# Altium PCB PCB_Hammond_1591GSGY-v3B.PcbDoc
Units mil, origin at the board's own origin, x right, y up, seen from the top; angles counter-clockwise.
Board outline 4566.93 x 3503.94 mil, 2 copper layers (Top Layer, Bottom Layer); 57 components, 74 nets, 338 pads, 109 vias.
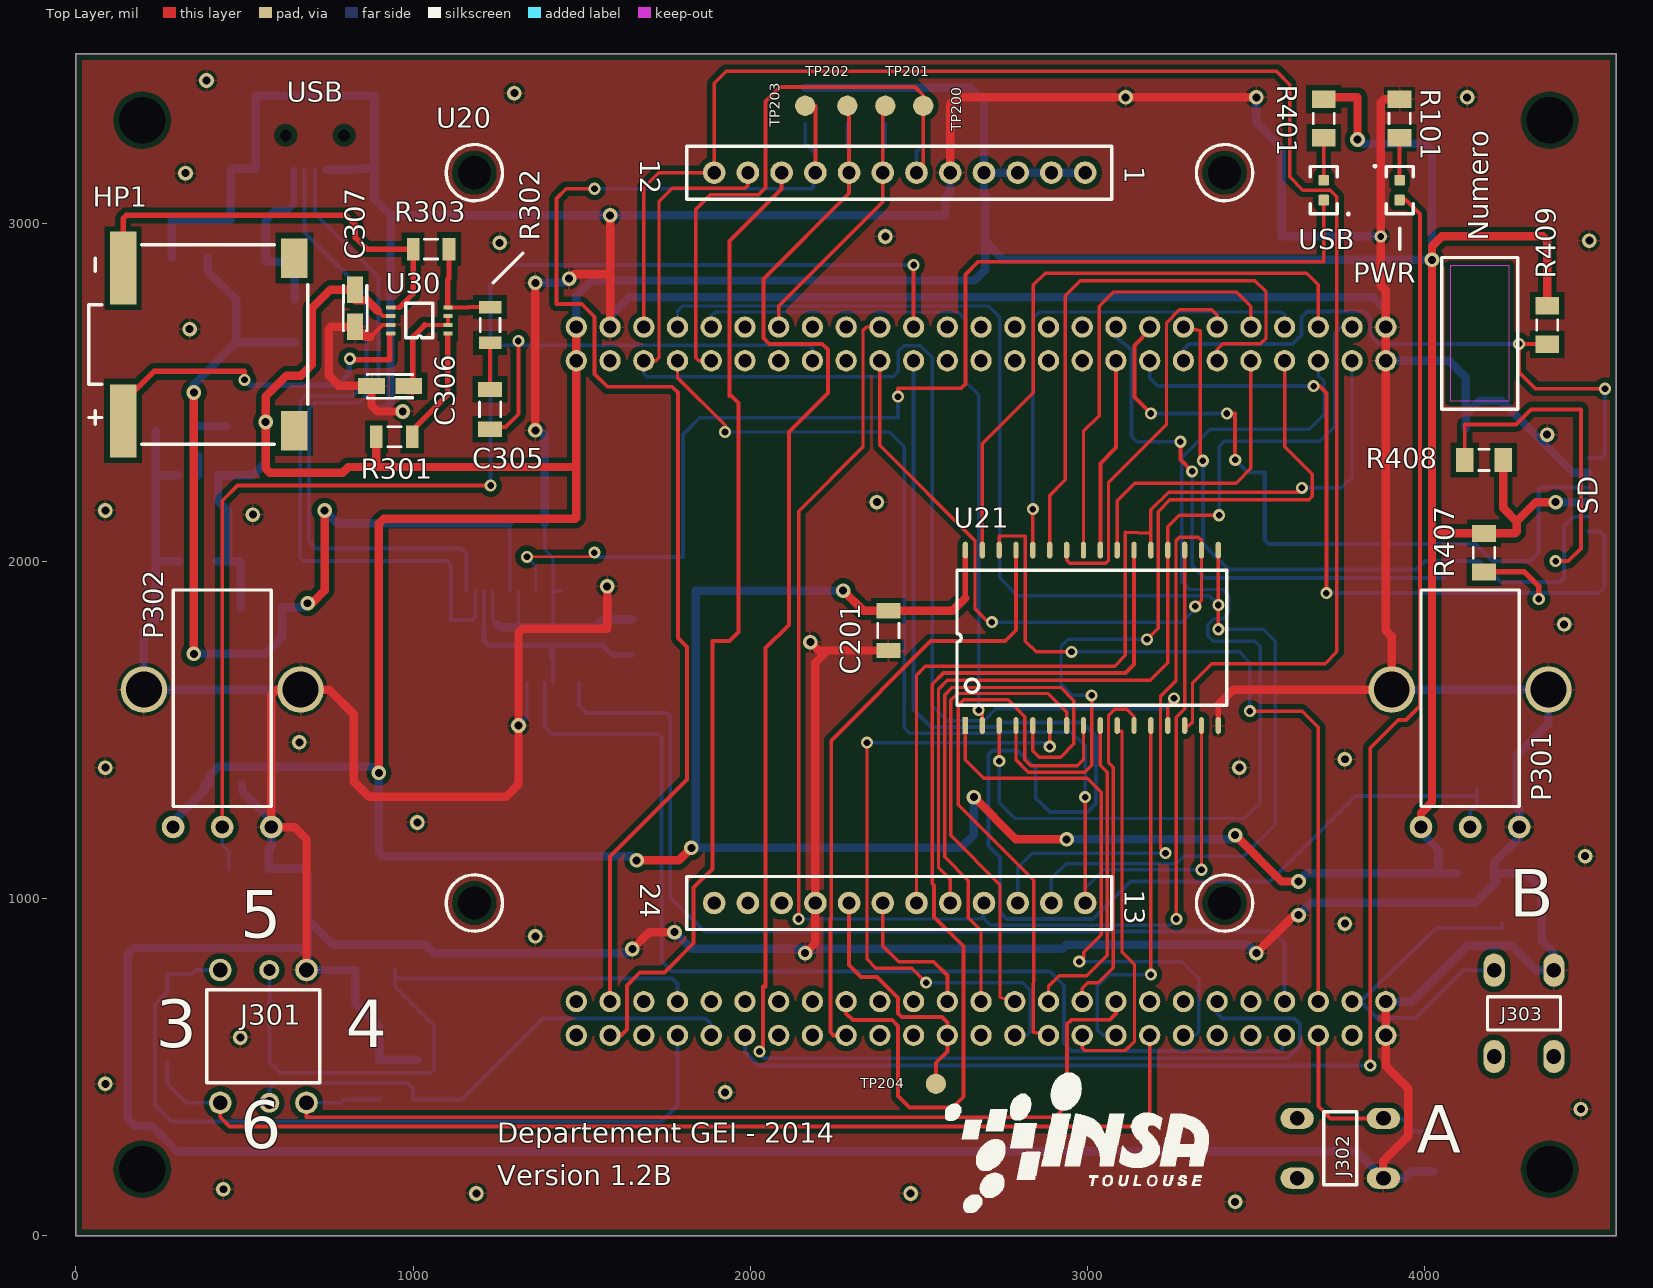
[diagram p0: Top Layer view]
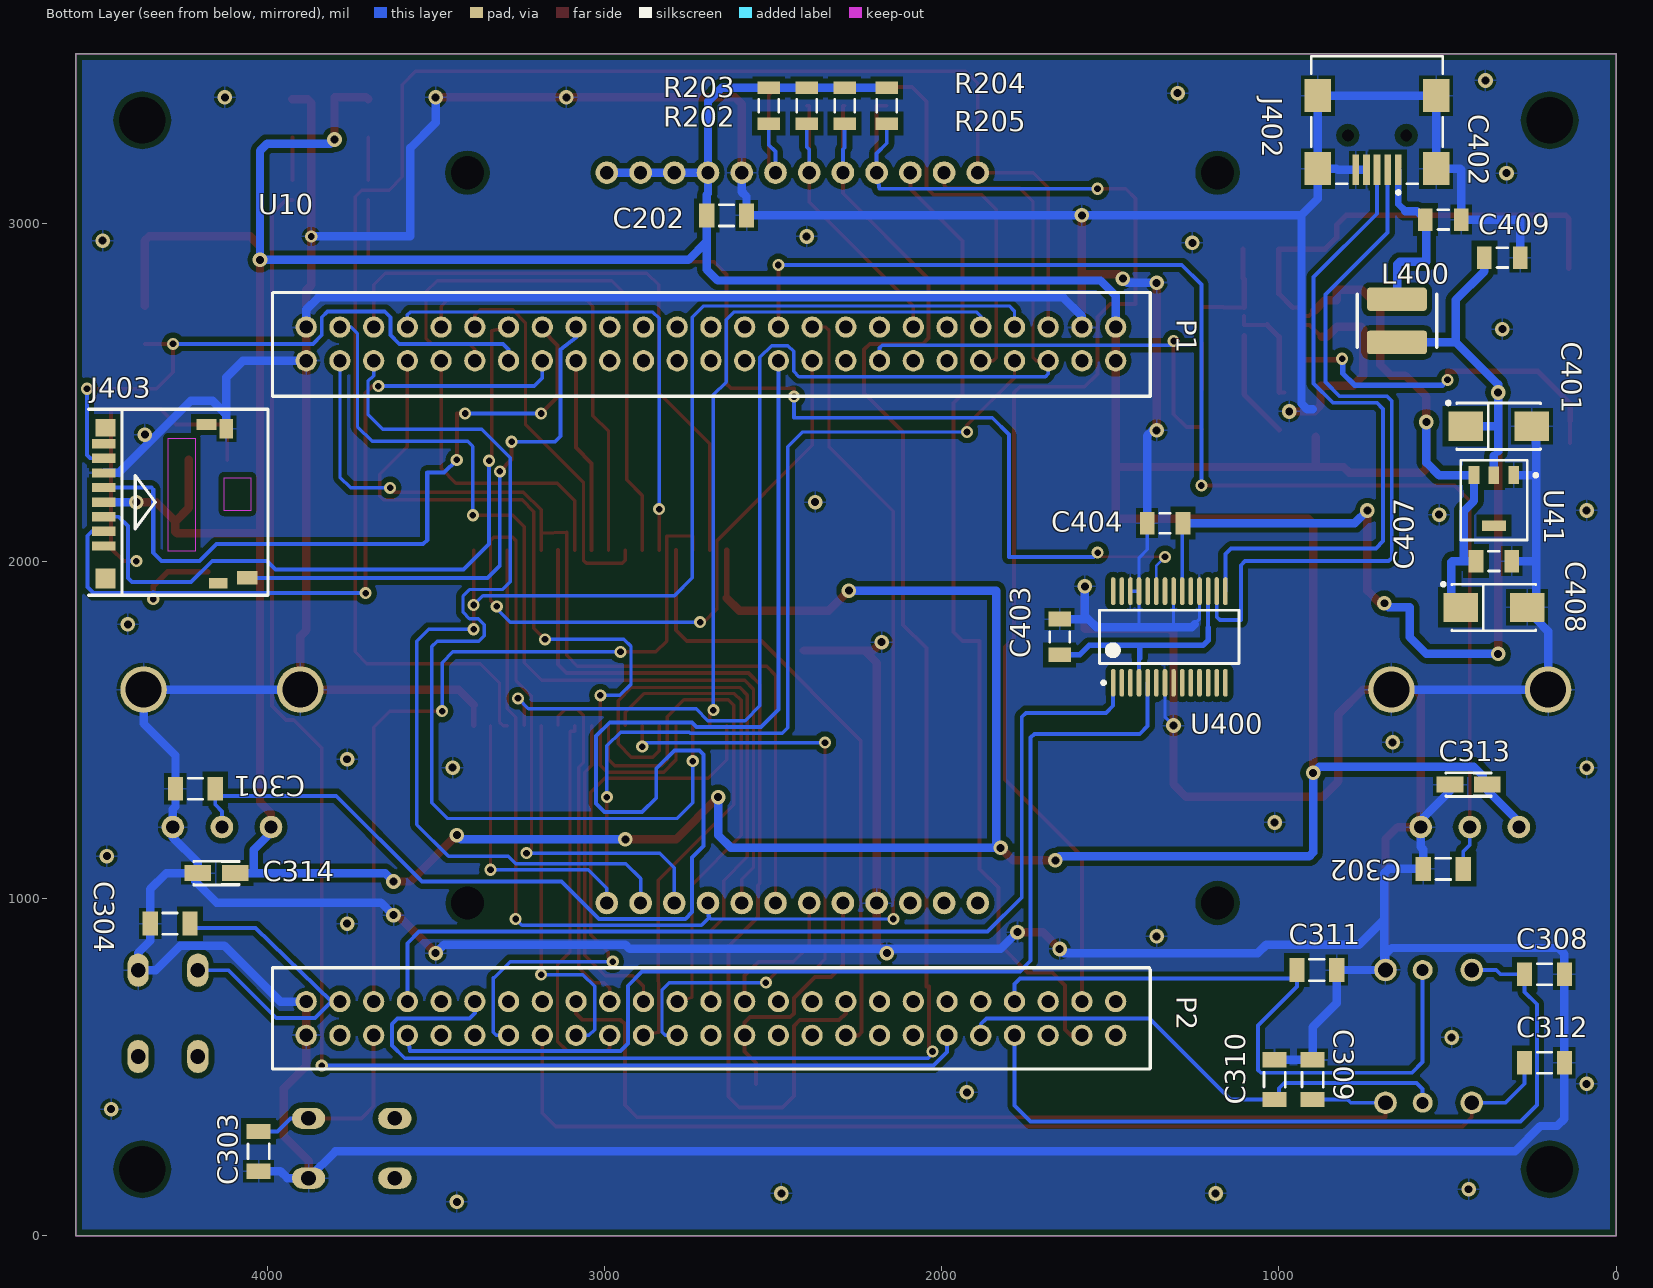
[diagram p1: Bottom Layer view, seen from below]

## Layer stack, top to bottom
Top Solder: solder mask 0.4, Solder Resist, Dk 3.5
Top Layer: signal copper 1.4
Dielectric1: dielectric 12.6, FR-4, Dk 4.8
Bottom Layer: signal copper 1.4
Bottom Solder: solder mask 0.4, Solder Resist, Dk 3.5

## Board outline
0,0 4566.93,0 4566.93,3503.94 0,3503.94

## Design rules (kind name [scope] priority, off if disabled: settings)
Clearance "Polygon Clearance" [InPolygon] p1: gap=16
Clearance [All] p2: gap=8
ComponentClearance [All] p1 off: gap=10 collisioncheckmode=3 verticalgap=10 showdistances=FALSE
DiffPairsRouting [All] p1: maxlimit=393.7 minlimit=4.92 mostfreqgap=5.91 toplayer_minwidth=15 toplayer_maxwidth=15 toplayer_prefwidth=15 bottomlayer_minwidth=15 bottomlayer_maxwidth=15 bottomlayer_prefwidth=15 maxuncoupledlength=500
FabricationTestPointUsage FabricationTestPointUsage_1 [All] p1: valid=0 allowmultiple=FALSE
FabricationTestpoint FabricationTestpoint_1 [All] p1: side=3 testpointundercomponent=TRUE minsize=40 maxsize=100 preferedsize=60 minholesize=0 maxholesize=40 preferedholesize=32 testpointgrid=1 allowsidetop=TRUE allowsidebottom=TRUE usegrid=TRUE gridtolerance=0.01
HoleSize [All] p1: absolutevalues=TRUE maxlimit=236.22 minlimit=11.81 maxpercent=80.000 minpercent=20.000
HoleSize FabricationTestpoint [All] p2 off: absolutevalues=TRUE maxlimit=100 minlimit=1 maxpercent=80.000 minpercent=20.000
HoleSize FabricationTestPointUsage [All] p3 off: absolutevalues=TRUE maxlimit=100 minlimit=1 maxpercent=80.000 minpercent=20.000
MinimumSolderMaskSliver [All] p1: minsoldermaskwidth=1.93
PlaneClearance [All] p1: clearance=19.68
PlaneConnect PlaneConnect_Power [InNetClass('Powwer')] p1: planeconnectstyle=Relief reliefexpansion=20 reliefentries=4 reliefconductorwidth=16 reliefairgap=16
PlaneConnect [All] p2: planeconnectstyle=Relief reliefexpansion=15.75 reliefentries=4 reliefconductorwidth=8 reliefairgap=10
PolygonConnect [All] p1: connectstyle=Relief reliefconductorwidth=5.91 reliefentries=4 polygonreliefangle="90 Angle" airgapwidth=10
RoutingCorners [All] p1: cornerstyle=45-Degree minsetback=16 maxsetback=16
RoutingVias RoutingVias_Power [InNetClass('Powwer')] p1: holewidth=23.62 width=43.31 viastyle="Through Hole" minholewidth=23.62 minwidth=43.31 maxholewidth=23.62 maxwidth=43.31
RoutingVias [All] p2: holewidth=19.68 width=35.83 viastyle="Through Hole" minholewidth=19.68 minwidth=35.83 maxholewidth=19.68 maxwidth=35.83
SMDNeckDown SMDNeckDown_others [InNetClass('Others')] p1: percent=100.000
SMDNeckDown SMDNeckDown_Power [InNetClass('Powwer')] p2: percent=100.000
SilkToSolderMaskClearance SilkscreenOverComponentPads [IsPad] p1: minsilkscreentomaskgap=10 clearancetoexposedcopper=TRUE
SolderMaskExpansion [All] p1: expansion=2.95
Width "Add bus" [InNetClass('A[0..18]')] p1: maxlimit=10 minlimit=8 preferedwidth=10
Width "Data Bus" [InNetClass('D[0..7]')] p2: maxlimit=10 minlimit=8 preferedwidth=10
Width "Power Bus" [InNetClass('Power')] p3: maxlimit=25 minlimit=9.8 preferedwidth=25
Width Default [All] p4: maxlimit=16 minlimit=8 preferedwidth=11.5
19 further rules are at their usual default settings.

## Classes and differential pairs
net class Power: 5V GND USB_VCC VCC
net class D[0..7]: D0 D1 D2 D3 D4 D5 D6 D7
net class A[0..18]: A0 A1 A2 A3 A4 A5 A6 A7 A8 A9 A10 A11 A12 A13 A14 A15 A16 A17 A18
component class Power_Debug: C401 C402 C403 C404 C407 C408 C409 J402 J403 L400 R401 R407 R408 R409 U41 U400 USB
component class MCU: PWR R101 U10
component class LCD_SRAM: C201 C202 R202 R203 R204 R205 TP200 TP201 TP202 TP203 TP204 U20 U21
component class Audio_Keys: C301 C302 C303 C304 C305 C306 C307 C308 C309 C310 C311 C312 C313 C314 HP1 J301 J302 J303 P301 P302 R301 R302 R303 U30

## Components (designator, comment, footprint, x,y, rotation, side; value= is the part's Value field where it differs from the comment)
C201 "CAP 100nF 16V 1206(3216)" CAPC1206(3216)100_N 2408.91,1793.91 r270 top
C202 "CAP 100nF 16V 1206(3216)" CAPC1206(3216)100_N 2637.5,3025 r180 bottom
C301 "CAP 100nF 16V 1206(3216)" CAPC1206(3216)100_N 4212.5,1325 r180 bottom
C302 "CAP 100nF 16V 1206(3216)" CAPC1206(3216)100_N 512.5,1087.5 r180 bottom
C303 "CAP 100nF 16V 1206(3216)" CAPC1206(3216)100_N 4025,250 r90 bottom
C304 "CAP 100nF 16V 1206(3216)" CAPC1206(3216)100_N 4287.5,925 r180 bottom
C305 "CAP 100nF 16V 1206(3216)" CAPC1206(3216)100_N 1228.15,2450 r270 top
C306 "Cap Pol3" "EAI 3216-18 A" 931.74,2518.59 r180 top
C307 "Cap Pol3" "EAI 3216-18 A" 828.15,2750 r270 top
C308 "CAP 100nF 16V 1206(3216)" CAPC1206(3216)100_N 212.5,775 r180 bottom
C309 "CAP 100nF 16V 1206(3216)" CAPC1206(3216)100_N 900,462.5 r90 bottom
C310 "CAP 100nF 16V 1206(3216)" CAPC1206(3216)100_N 1012.5,462.5 r90 bottom
C311 "CAP 100nF 16V 1206(3216)" CAPC1206(3216)100_N 887.5,787.5 r180 bottom
C312 "CAP 100nF 16V 1206(3216)" CAPC1206(3216)100_N 212.5,512.5 r180 bottom
C313 "Cap Pol3" "EAI 3216-18 A" 437.5,1337.5 r0 bottom
C314 "Cap Pol3" "EAI 3216-18 A" 4150,1075 r0 bottom
C401 "Cap Pol3" 6032 348.13,2399.89 r180 bottom
C402 "Cap Semi" CAPC3216L 512.5,3012.5 r0 bottom
C403 "Cap Semi" CAPC3216L 1650,1775 r270 bottom
C404 "Cap Semi" CAPC3216L 1337.5,2112.5 r180 bottom
C407 "Cap Semi" CAPC3216L 362.5,2000 r0 bottom
C408 "Cap Pol3" 6032 362.5,1862.5 r180 bottom
C409 "Cap Semi" CAPC3216L 337.5,2900 r0 bottom
HP1 "NDT-03C" KAAG15008C 687.5,2937.5 r270 top
J301 "SKQUCAA010" SKQUCAA010 683.91,393.91 r90 top locked
J302 "SPST MicroSwitch" SPST_MicroSwitch 3758.91,268.91 r180 top locked
J303 "SPST MicroSwitch" SPST_MicroSwitch 4283.91,668.91 r270 top locked
J402 "440247-1" 440247 708.91,3468.91 r90 bottom locked
J403 "DM3D-SF" DM3D-SF 4508.91,1918.91 r270 bottom locked
L400 "Inductor" NPI43C 650,2712.5 r270 bottom
P301 "POT Type 51" "POT Type 51" 4133.91,1618.91 r0 top locked
P302 "POT Type 51" "POT Type 51" 433.91,1618.91 r0 top locked
PWR "Led" "OSRAM LO Q971" 3925,3100 r90 top
R101 "Res_EU" RESC3216N 3925,3312.5 r270 top
R202 "10K" RESC1206(3216)_L 2512.5,3350 r270 bottom
R203 "10K" RESC1206(3216)_L 2400,3350 r270 bottom
R204 "10K" RESC1206(3216)_L 2287.5,3350 r270 bottom
R205 "10K" RESC1206(3216)_L 2162.5,3350 r270 bottom
R301 "1K" RESC1206(3216)_L 944.24,2368.59 r180 top
R302 "22K" RESC1206(3216)_L 1228.15,2700 r90 top
R303 "22K" RESC1206(3216)_L 1053.15,2925 r180 top
R401 "Res_EU" RESC3216N 3700,3312.5 r270 top
R407 "22R" RESC3216N 4175,2025 r270 top
R408 "22R" RESC3216N 4175,2300 r180 top
R409 "22R" RESC3216N 4362.5,2700 r270 top
TP200 "TestPoint" TP1 2512.5,3350 r90 top
TP201 "TestPoint" TP1 2400,3350 r90 top
TP202 "TestPoint" TP1 2287.5,3350 r90 top
TP203 "TestPoint" TP1 2162.5,3350 r90 top
TP204 "TestPoint" TP1 2550,450 r90 top
U10 "STM32F3-DISCOVERY" STM32F3-DISCOVERY 2483.91,1693.91 r270 bottom locked
U20 "INT024BTFT" INT024BTFT 2283.91,2068.91 r270 top locked
U21 "AS64C4008" SOP32 2637.5,1512.5 r90 top
U30 "TS4990" MiniSOP-8 1103.15,2675 r180 top
U41 "XC6214" SOT-89 362.5,2200 r0 bottom
U400 "FT232RL-Reel" SSOP-28_N 1325,1775 r90 bottom
USB "Led" "OSRAM LO Q971" 3700,3100 r270 top

## Footprints (in the part's own frame and the unit in brackets; to place one, negate y for a bottom-side part, rotate by r counter-clockwise, add the part's x,y. Pads: shape width x height; smd on the part's side, far side on the other; paste and mask are expansions set on the pad)
6032 [mm] "Capacitor, SM Tantalum; Body 6.0 x 3.2 mm (LxW typ)"
  rect 2.6x2.2 smd: 1(-2.5,0) 2(2.5,0)
  silkscreen extent -3.93,-1.75 3.15,1.87
440247 [mm] "Connector; USB2.0, Type B, SM; 5 Position; Right Angle"
  rect 2.3x0.5 smd: 1(-7.85,-1.6) 2(-7.85,-0.8) 3(-7.85,0) 4(-7.85,0.8) 5(-7.85,1.6)
  rect 2.5x2 smd: 6(-7.75,4.45) 7(-2.25,4.45) 8(-7.75,-4.45) 9(-2.25,-4.45)
  round 0.6 hole 0.9 unplated: MH1(-5.25,2.2) MH2(-5.25,-2.2)
  silkscreen extent -9.67,-4.95 0.7,4.95
CAPC1206(3216)100_N [mm] "Chip Capacitor, Body 3.2x1.6mm, Height 1mm, IPC Medium Density"
  rect 1.15x1.8 smd: 1(-1.5,0) 2(1.5,0)
  silkscreen extent -0.55,-0.8 0.55,0.8, body extent -1.7,-0.9 1.7,0.9, height 1
CAPC3216L [mm] "Chip Capacitor, Body 3.2x1.6mm, IPC High Density"
  rect 1.1x1.7 smd: 1(-1.35,0) 2(1.35,0)
  silkscreen extent -0.4,-0.75 0.4,0.75, body extent -1.7,-0.9 1.7,0.9, height 1.3
DM3D-SF [mm] "MicroSD card connector"
  rect 0.7x1.75 smd: 1(-3.2,0.625) 2(-4.3,0.625) 3(-5.4,0.625) 4(-6.5,0.625) 5(-7.6,0.625) 6(-8.7,0.625) 7(-9.8,0.625) 8(-10.9,0.625)
  rect 1x1.55 smd: A(-0.8,11.425)
  rect 1.45x1 smd: B(-12.025,9.85)
  rect 1.5x1.5 smd: G0(-0.75,0.75)
  rect 1.3x1.5 smd: G1(-12.1,0.75)
  rect 0.8x1.4 smd: G2(-0.4,9.25)
  rect 0.8x1.5 smd: G3(-12.35,8.35)
  Top Layer keep-out region: -11.3,7.5 -2.8,7.5 -2.8,5.5 -11.3,5.5
  Top Layer keep-out region: -8.35,11.7 -5.85,11.7 -5.85,9.7 -8.35,9.7
  silkscreen extent -13.5,-0.5 0.5,13
"EAI 3216-18 A" [mm] "Capacitor, SM Tantalum; Body 3.2 x 1.6 mm (LxW typ)"
  rect 2x1.2 smd: 1(-1.4,0) 2(1.4,0)
  silkscreen extent -1.7,-0.9 1.7,0.9
INT024BTFT [mm]
  round 1.7 hole 1: 1(-27.5,18) 2(-27.5,15.46) 3(-27.5,12.92) 4(-27.5,10.38) 5(-27.5,7.84) 6(-27.5,5.3) 7(-27.5,2.76) 8(-27.5,0.22) 9(-27.5,-2.32) 10(-27.5,-4.86) 11(-27.5,-7.4) 12(-27.5,-9.94) 13(27.5,18) 14(27.5,15.46) 15(27.5,12.92) 16(27.5,10.38) 17(27.5,7.84) 18(27.5,5.3) 19(27.5,2.76) 20(27.5,0.22) 21(27.5,-2.32) 22(27.5,-4.86) 23(27.5,-7.4) 24(27.5,-9.94)
  round 1.524 hole 2.5 unplated: D1(-27.5,28.5) D2(27.5,28.5) D3(27.5,-28) D4(-27.5,-28)
  silkscreen extent -29.62,-30.12 29.62,30.62
KAAG15008C [mm]
  rect 3x2 smd: 1(1,-1) 4(14,-1)
  rect 5.5x2 smd: 2(1.75,-13.9) 3(13.25,-13.9)
  silkscreen extent 0,-16.5 15,0
MiniSOP-8 [mm]
  rect 0.7x0.3 smd: 1(0,0) 2(0,-0.65) 3(0,-1.3) 4(0,-1.95) 5(4.3,-1.95) 6(4.3,-1.3) 7(4.3,-0.65) 8(4.3,0)
  silkscreen extent 1.13,-2.28 3.16,0.33
NPI43C [mm] "NPI inductor 43C"
  rrect25% 1.75x4.5 smd: 1(-1.625,0)
  rrect20% 1.75x4.5 smd: 2(1.625,0)
  silkscreen extent -2,-3 2,3
"OSRAM LO Q971" [mm] "Chip Led"
  rrect25% 0.8x0.8 smd: A(-0.75,0) K(0.75,0)
  silkscreen extent -1.78,-1.02 1.85,1.9
"POT Type 51" [mm]
  round 1.7 hole 1: 1(-3.7,-10.35) 2(0,-10.35) 3(3.7,-10.35)
  round 3.5 hole 2.7: 4(-5.9,0) 5(5.9,0)
  silkscreen extent -3.7,-8.8 3.7,7.5
RESC1206(3216)_L [mm] "Chip Resistor, Body 3.2x1.6mm, IPC High Density"
  rect 0.95x1.7 smd: 1(-1.35,0) 2(1.35,0)
  silkscreen extent -0.5,-0.75 0.5,0.75, body extent -1.67,-0.87 1.67,0.87, height 0.75
RESC3216N [mm] "Chip Resistor, Body 3.2x1.6mm, IPC Medium Density"
  rect 1.3x1.8 smd: 1(-1.45,0) 2(1.45,0)
  silkscreen extent -0.4,-0.8 0.4,0.8, body extent -1.68,-0.87 1.68,0.87, height 0.71
SKQUCAA010 [mm] "4 ways + Center switch"
  round 1.7 hole 1.1: 1(0,6.5) 3(0,0) 4(10,0) 6(10,6.5)
  round 1.5 hole 0.9: 2(0,2.8) 5(10,2.8)
  silkscreen extent 1.5,-1 8.5,7.5
SOP32 [mil]
  rect 50x16 smd: 1(0,0)
  oval 50x16 smd: 2(0,-50) 3(0,-100) 4(0,-150) 5(0,-200) 6(0,-250) 7(0,-300) 8(0,-350) 9(0,-400) 10(0,-450) 11(0,-500) 12(0,-550) 13(0,-600) 14(0,-650) 15(0,-700) 16(0,-750) 17(520,-750) 18(520,-700) 19(520,-650) 20(520,-600) 21(520,-550) 22(520,-500) 23(520,-450) 24(520,-400) 25(520,-350) 26(520,-300) 27(520,-250) 28(520,-200) 29(520,-150) 30(520,-100) 31(520,-50) 32(520,0)
  silkscreen extent 60,-775 460,25
SOT-89 [mm] "SOT-89; Body 4.6 x 4.25 mm, inc. leads (LxW max)"
  rect 0.8x1.35 smd: 1(-1.5,-1.387) 2(0,-1.387) 3(1.5,-1.387)
  rect 1.8x0.8 smd: 4(0,2.413)
  silkscreen extent -3.27,-2.51 2.5,3.49
SPST_MicroSwitch [mm]
  oval 2.5x1.6 hole 1.1: 1(-3,2.5) 2(3.5,2.5) 3(-3,-2) 4(3.5,-2)
  silkscreen extent -1,-2.5 1.5,3
SSOP-28_N [mm] "SOP, 28-Leads, Body 10.2x5.3mm, Pitch 0.65mm, IPC Medium Density"
  oval 2.1x0.35 smd: 1(-3.45,4.225) 2(-3.45,3.575) 3(-3.45,2.925) 4(-3.45,2.275) 5(-3.45,1.625) 6(-3.45,0.975) 7(-3.45,0.325) 8(-3.45,-0.325) 9(-3.45,-0.975) 10(-3.45,-1.625) 11(-3.45,-2.275) 12(-3.45,-2.925) 13(-3.45,-3.575) 14(-3.45,-4.225) 15(3.45,-4.225) 16(3.45,-3.575) 17(3.45,-2.925) 18(3.45,-2.275) 19(3.45,-1.625) 20(3.45,-0.975) 21(3.45,-0.325) 22(3.45,0.325) 23(3.45,0.975) 24(3.45,1.625) 25(3.45,2.275) 26(3.45,2.925) 27(3.45,3.575) 28(3.45,4.225)
  silkscreen extent -3.57,-5.25 2,5.25, body extent -2.8,-5.25 2.8,5.25, height 2
STM32F3-DISCOVERY [mm]
  round 1.6 hole 1: 1(-25.4,25.4) 2(-22.86,25.4) 3(-25.4,22.86) 4(-22.86,22.86) 5(-25.4,20.32) 6(-22.86,20.32) 7(-25.4,17.78) 8(-22.86,17.78) 9(-25.4,15.24) 10(-22.86,15.24) 11(-25.4,12.7) 12(-22.86,12.7) 13(-25.4,10.16) 14(-22.86,10.16) 15(-25.4,7.62) 16(-22.86,7.62) 17(-25.4,5.08) 18(-22.86,5.08) 19(-25.4,2.54) 20(-22.86,2.54) 21(-25.4,0) 22(-22.86,0) 23(-25.4,-2.54) 24(-22.86,-2.54) 25(-25.4,-5.08) 26(-22.86,-5.08) 27(-25.4,-7.62) 28(-22.86,-7.62) 29(-25.4,-10.16) 30(-22.86,-10.16) 31(-25.4,-12.7) 32(-22.86,-12.7) 33(-25.4,-15.24) 34(-22.86,-15.24) 35(-25.4,-17.78) 36(-22.86,-17.78) 37(-25.4,-20.32) 38(-22.86,-20.32) 39(-25.4,-22.86) 40(-22.86,-22.86) 41(-25.4,-25.4) 42(-22.86,-25.4) 43(-25.4,-27.94) 44(-22.86,-27.94) 45(-25.4,-30.48) 46(-22.86,-30.48) 47(-25.4,-33.02) 48(-22.86,-33.02) 49(-25.4,-35.56) 50(-22.86,-35.56) 51(25.4,25.4) 52(27.94,25.4) 53(25.4,22.86) 54(27.94,22.86) 55(25.4,20.32) 56(27.94,20.32) 57(25.4,17.78) 58(27.94,17.78) 59(25.4,15.24) 60(27.94,15.24) 61(25.4,12.7) 62(27.94,12.7) 63(25.4,10.16) 64(27.94,10.16) 65(25.4,7.62) 66(27.94,7.62) 67(25.4,5.08) 68(27.94,5.08) 69(25.4,2.54) 70(27.94,2.54) 71(25.4,0) 72(27.94,0) 73(25.4,-2.54) 74(27.94,-2.54) 75(25.4,-5.08) 76(27.94,-5.08) 77(25.4,-7.62) 78(27.94,-7.62) 79(25.4,-10.16) 80(27.94,-10.16) 81(25.4,-12.7) 82(27.94,-12.7) 83(25.4,-15.24) 84(27.94,-15.24) 85(25.4,-17.78) 86(27.94,-17.78) 87(25.4,-20.32) 88(27.94,-20.32) 89(25.4,-22.86) 90(27.94,-22.86) 91(25.4,-25.4) 92(27.94,-25.4) 93(25.4,-27.94) 94(27.94,-27.94) 95(25.4,-30.48) 96(27.94,-30.48) 97(25.4,-33.02) 98(27.94,-33.02) 99(25.4,-35.56) 100(27.94,-35.56)
  silkscreen extent -28,-38.1 30.48,28
TP1 [mil] "Test point SMD"
  round 60 smd: 1(0,0)

## Part data
C201 C202 C301 C302 C303 C304 C305 C308 C309 C310 C311 C312: library part CMP-1037-04185-1, "CAP 100nF 16V -20% to +80% 1206 (3216 Metric) Thickness 1mm SMD"
C306 C307 C313 C314 C401 C408: "Polarized Capacitor (Surface Mount)"
C402 C403 C404 C407 C409: "Capacitor (Semiconductor SIM Model)"
HP1: "Audio HP"
J301: "4 ways + center switch"
J302 J303: "SPST - MicroSwitch"
J402: "USB 2.0, Right Angle, SMT, B Type, Receptacle, 5 Position, Black"
L400: "Inductor SMD"
P301 P302: "25mm Diameter potentiometer"
R101 R401: "Resistor"
R202 R203 R204 R205 R301 R302 R303: library part CMP-1014-00623-1, "10K 0.25W 1% 1206 (3216 Metric)  SMD"
R407 R408 R409: library part Res_EU, "Resistor"
TP200 TP201 TP202 TP203 TP204: "TestPoint SMD"
U10: "STM32F3-Discovery"
U20: library part "LCD INT024BTFT"
U21: "SRAM 4Mbits 512K*8Bits 55 ns"
U41: "Fixed LDO regulator"
U400: "USB UART Asynchronous Serial Data Transfer Chip, SSOP-28, Tape and Reel"

## Free pads (board coordinates)
  round 129.92 hole 137.8: 1(196.85,196.85) 1(196.85,3307.09) 1(4370.08,196.85) 1(4370.08,3307.09)

## Via types
v1: diameter 43.31, hole 23.62, Top Layer to Bottom Layer, 60 vias
v2: diameter 35.83, hole 19.68, Top Layer to Bottom Layer, 49 vias

## Nets (pads, with @x,y where several pads share a name; then routed paths per layer and width w, separated by ;. In a path a pad name is that pad's centre, name@x,y a point inside that pad or via, vN(x,y) a via of type N, cw(c..) or ccw(c..) an arc to the next point about the centre after c; other vN are vias at no path point)
5V: C401.1 C404.2 C409.2 L400.2 U41.2 U400.20 | length 3285.4
  Top Layer w25: v1(350,1725) v1(350,2500) ; v1(687.5,1875) 700,1875 737.5,1912.5 v1(737.5,2150)
  Bottom Layer w9.8: C404.2 1286.61,2110.24 U400.20
  Bottom Layer w25: v1(350,1725) 562.5,1725 612.5,1775 612.5,1862.5 675,1862.5 v1(687.5,1875) ; 350,2325 v1(350,2500) 350,2524.02 475.98,2650 ; 350.11,2399.89 C401.1 ; U41.2 362.5,2312.5 ; C409.2 390.65,2859.35 475.98,2774.02 475.98,2650 ; L400.2 477.46,2648.52 475.98,2650 ; v1(737.5,2150) 775,2112.5 C404.2
A0: U10.84 U21.12 | length 1101.7
  Top Layer w10: v2(3187.5,773.91) U21.12
  Bottom Layer w10: U10.84 3045.91,593.91 3028.91,610.91 3028.91,738.91 3063.91,773.91 v2(3187.5,773.91)
A1: U10.81 U21.11 | length 1030.2
  Top Layer w10: U10.81 2983.91,733.91 2999.91,749.91 3031.91,749.91 3075.91,793.91 3075.91,1388.41 3061.91,1402.41 3061.91,1542.91 3079.91,1560.91 3115.5,1560.91 3137.5,1538.91 U21.11
A2: U10.82 U21.10 | length 1172.8
  Top Layer w10: U10.82 2983.91,556.91 2991.91,548.91 3111.91,548.91 3138.91,575.91 3138.91,802.91 3101.91,839.91 3101.91,1495.91 3087.5,1495.91 U21.10
A3: U10.79 U21.9 | length 947.2
  Top Layer w10: U10.79 2883.91,738.91 2915.91,770.91 2997.91,770.91 3057.91,830.91 3057.91,1374.41 3037.5,1394.82 U21.9
A4: U10.80 U21.8 | length 1752.1
  Top Layer w10: U10.80 2838.91,602.91 2839.91,899.91 2839.91,1053.91 2615.91,1277.91 2615.91,1572.91 2631.91,1588.91 2763.91,1588.91 2813.91,1538.91 2813.91,1410.91 2831.91,1392.91 2969.5,1392.91 2987.5,1410.91 U21.8
A5: U10.77 U21.7 | length 1401.9
  Top Layer w10: U10.77 2739.91,705.91 2739.91,1040.79 2593.79,1186.91 2593.79,1586.91 2614.2,1607.33 2882.49,1607.33 2937.5,1552.32 U21.7
A6: U10.78 U21.6 | length 1930.2
  Top Layer w10: v2(2345.91,1461.91) 2345.91,818.91 2371.91,792.91 2477.91,792.91 v2(2520.91,749.91) ; v2@2887.5,1461.91 U21.6
  Bottom Layer w10: v2(2345.91,1461.91) v2@2887.5,1461.91 ; v2(2520.91,749.91) 2807.91,749.91 2828.91,728.91 2828.91,602.91 2819.91,593.91 U10.78
  other v2: 2887.5,1450
A7: U10.75 U21.5 | length 1711.1
  Top Layer w10: U10.75 2683.91,903.91 2645.91,941.91 2645.91,1052.79 2575.79,1122.91 2575.79,1602.91 2598.2,1625.33 2919.91,1625.33 2958.91,1586.33 2958.91,1457.91 2919.91,1418.91 2855.91,1418.91 2837.5,1437.32 U21.5
A8: U10.40 U21.27 | length 1730.2
  Top Layer w10: U21.27 2887.5,2194.5 2933.91,2240.91 2933.91,2786.91 2977.91,2830.91 3495.91,2830.91 3528.91,2797.91 3528.91,2660.91 3511.91,2643.91 3399.91,2643.91 3383.91,2627.91 U10.40
A9: U10.39 U21.26 | length 1144.1
  Top Layer w10: U21.26 2937.5,2002.91 2946.5,1993.91 3052.91,1993.91 3061.91,2002.91 3061.91,2233.91 3233.91,2405.91 3233.91,2706.91 3271.91,2744.91 3367.91,2744.91 3383.91,2728.91 U10.39
A10: U10.42 U21.23 | length 901.6
  Top Layer w10: U21.23 3087.5,2178.91 3139.5,2230.91 3439.91,2230.91 3483.91,2274.91 U10.42
A11: U10.41 U21.25 | length 1288.3
  Top Layer w10: U21.25 2987.5,2384.91 3033.91,2431.32 3033.91,2754.91 3076.91,2797.91 3440.91,2797.91 3483.91,2754.91 U10.41
A12: U10.44 U21.4 | length 2341.3
  Top Layer w10: U21.4 2787.5,1410.82 2823.91,1374.41 2991.41,1374.41 3011.91,1394.91 v2(3011.91,1601.91) ; v2(3175.91,1767.91) 3208.91,1800.91 3208.91,2146.91 3243.91,2181.91 3655.91,2181.91 3665.91,2191.91 3665.91,2256.91 3583.91,2338.91 U10.44
  Bottom Layer w10: v2(3011.91,1601.91) 2953.91,1601.91 2920.91,1634.91 2920.91,1746.91 2941.91,1767.91 v2(3175.91,1767.91)
A13: U10.43 U21.28 | length 1481.3
  Top Layer w10: U21.28 v2(2837.5,2153.91)
  Bottom Layer w10: v2(2837.5,2153.91) 2837.5,2720 2855.91,2738.41 3575.91,2738.41 3583.91,2730.41 U10.43
A14: U10.46 U21.3 | length 3000.5
  Top Layer w10: U21.3 2737.5,1407.32 v2(2737.91,1406.91)
  Bottom Layer w10: v2(2737.91,1406.91) 2737.91,1282.91 2783.91,1236.91 3465.91,1236.91 3511.91,1282.91 3511.91,1746.73 3495.91,1762.73 3372.09,1762.73 3355.91,1778.91 3355.91,1810.91 3373.91,1828.91 3399.91,1828.91 3418.91,1847.91 3418.91,1896.6 3399.91,1915.6 3302.22,1915.6 3278.91,1938.91 3278.91,2306.91 3362.82,2390.82 3656.74,2390.82 3700.82,2434.91 3700.82,2532.91 3683.91,2549.82 U10.46
A15: U10.45 U21.31 | length 1848.1
  Top Layer w10: U21.31 2687.5,2347.5 2838.91,2498.91 2838.91,2818.91 2873.91,2853.91 3648.91,2853.91 3683.91,2818.91 U10.45
A16: U10.9 U21.2 | length 2025
  Top Layer w10: v2(2676.91,1557.91) 2687.5,1547.32 U21.2
  Bottom Layer w10: U10.9 1883.91,2726.41 1895.91,2738.41 2615.91,2738.41 2638.91,2715.41 2638.91,2530.91 2676.91,2492.91 v2(2676.91,1557.91)
A17: U10.95 U21.30 | length 2302.8
  Top Layer w10: U21.30 2737.5,2074.5 2814.91,2073.91 2814.91,1762.91 2846.91,1730.91 v2(2951.91,1730.91) ; v2(3480.91,1554.91) 3635.91,1554.91 3683.91,1506.91 U10.95
  Bottom Layer w10: v2(2951.91,1730.91) 3448.91,1730.91 3480.91,1698.91 v2(3480.91,1554.91)
A18: U10.88 U21.1 | length 1657.2
  Top Layer w10: U21.1 2637.5,1410.91 2692,1356.41 2998.41,1356.41 3039.91,1314.91 3039.91,891.91 2987.91,839.91 2987.91,825.41 v2(2975,812.5)
  Bottom Layer w10: v2(2975,812.5) 3279,812.5 3327,764.5 3328.91,764.5 3328.91,602.91 3319.91,593.91 U10.88
D0: U10.6 U20.11 U21.13 | length 3701.2
  Top Layer w10: U10.6 1719.91,2593.91 1728.91,2602.91 1728.91,3065.91 1767.91,3104.91 1983.91,3104.91 1992.57,3113.57 U20.11 ; U21.13 3237.5,1570.5 3255.91,1588.91 v2(3255.91,1592.91)
  Bottom Layer w10: U10.6 1683.91,2554.91 1691.91,2546.91 2422.91,2546.91 2438.91,2562.91 2438.91,2621.91 2455.91,2638.91 2503.91,2638.91 2538.91,2603.91 2538.91,1570.91 2582.82,1527 2693,1527 2727.91,1561.91 3224.91,1561.91 v2(3255.91,1592.91)
D1: U10.5 U20.12 U21.14 | length 5041
  Top Layer w10: U10.5 1683.91,3106.91 1728.59,3151.59 U20.12 1892.57,3416.57 1927.91,3451.91 3559.91,3451.91 3598.91,3412.91 3598.91,3138.91 3637.91,3099.91 3719.91,3099.91 3738.91,3080.91 3738.91,1730.91 3703.91,1695.91 3367.91,1695.91 3310.91,1638.91 3310.91,1522.91 3299.91,1511.91 3287.5,1511.91 U21.14
D2: U10.8 U20.13 U21.15 | length 3518.3
  Top Layer w10: U10.8 1783.91,2543.91 1924.91,2402.91 v2(1924.91,2382.91) ; U20.13 v2(2992.57,1299.91) ; v2(3337.5,1084.87) U21.15
  Bottom Layer w10: v2(1924.91,2382.91) 2411.91,2382.91 2455.91,2338.91 2455.91,1505.5 2471.91,1489.5 2745.32,1489.5 2748.65,1492.82 2951.91,1492.82 2992.57,1452.16 v2(2992.57,1299.91) ; U20.13 2992.57,1029.53 3047.91,1084.87 v2(3337.5,1084.87)
D3: U10.7 U20.14 U21.17 | length 4240.1
  Top Layer w10: v2(3387.5,1797.91) v2(3387.5,1869.91) U21.17
  Bottom Layer w10: U10.7 1783.91,2740.41 1799.91,2756.41 2705.41,2756.41 2738.91,2722.91 2738.91,1950.6 2791.91,1897.6 3359.81,1897.6 v2(3387.5,1869.91) ; U20.14 2892.57,1058.91 2936.57,1102.91 3262.91,1102.91 3285,1125 3462,1125 3555.91,1218.91 3555.91,1762.91 3520.91,1797.91 v2(3387.5,1797.91)
D4: U10.20 U20.15 U21.18 | length 3344.9
  Top Layer w10: U10.20 2383.91,2342.91 2665.91,2060.91 2665.91,1858.91 2705.91,1818.91 v2(2715.91,1818.91) ; v2(3230.91,1133.91) 3215.91,1148.91 3215.91,1599.82 3261.91,1645.82 3261.91,2060.91 3271.91,2070.91 3327.91,2070.91 3337.5,2061.32 U21.18 3337.5,1884.5 v2(3318.91,1865.91)
  Bottom Layer w10: v2(2715.91,1818.91) 3278.91,1818.91 3318.91,1858.91 v2(3318.91,1865.91) ; U20.15 2792.57,1090.91 2835.57,1133.91 v2(3230.91,1133.91)
D5: U10.19 U20.16 U21.19 | length 4208.7
  Top Layer w10: v2(2142.91,938.91) 2142.91,2147.91 2333.91,2338.91 2333.91,2683.91 2343.91,2693.91 U10.19 ; v2(3262.91,938.91) 3262.91,1537.32 3287.5,1561.91 U21.19
  Bottom Layer w10: v2(2142.91,938.91) 2684.57,938.91 2688.92,943.26 ; v2(3262.91,938.91) 3244.27,920.27 2711.91,920.27 2688.92,943.26 ; 2688.92,943.26 U20.16 2692.57,946.91 2688.92,943.26
D6: U10.47 U20.17 U21.20 | length 2836.6
  Top Layer w10: U20.17 2592.57,1056.12 2557.79,1090.91 2557.79,1620.79 2583.91,1646.91 3185.5,1646.91 3237.5,1698.91 U21.20 3237.5,2101.5 3271.91,2135.91 v2(3389.91,2135.91)
  Bottom Layer w10: v2(3389.91,2135.91) 3389.91,2339.91 3404.91,2354.91 3687.91,2354.91 3731.91,2398.91 3731.91,2674.91 3750.91,2693.91 U10.47
D7: U10.48 U20.18 U21.21 | length 2861.7
  Top Layer w10: U20.18 2492.57,1662.26 2518.58,1688.27 3079.91,1688.27 3111.91,1720.27 3111.91,2085.91 3187.5,2082.91 ; U21.21 3187.5,2082.91 ; v2(3634.91,2216.91) 3622.37,2204.37 3239.91,2204.37 3187.5,2151.96 3187.5,2082.91
  Bottom Layer w10: v2(3634.91,2216.91) 3751.91,2216.91 3783.91,2248.91 U10.48
GND: C201.2 C202.2 C301.1 C302.1 C303.1 C304.1 C306.2 C307.2 C308.2 C309.2 C310.2 C311.2 C312.2 C313.2 C314.2 C401.2 C402.1 C403.1 C404.1 C407.1 C408.2 C409.1 J301.4 J302.1 J303.1 J402.4 J402.5 J402.6 J402.7 J402.8 J402.9 J403.6 J403.B P301.3 P301.4 P301.5 P302.3 P302.4 P302.5 R101.1 U10.3 U10.49 U10.50 U10.99 U10.100 U20.5 U20.21 U21.16 U30.7 U41.1 U400.7 U400.18 U400.21 U400.25 U400.26 | length 32669.2
  Top Layer w11.81: 873.03,2665 908.62,2700.59 U30.7
  Top Layer w16: U21.16 3387.5,1574.5
  Top Layer w25: J301.4 683.91,1175.43 647.91,1211.43 P302.3 579.58,1602.91 595.58,1618.91 P302.5 750.91,1618.91 823.91,1545.91 823.91,1346.91 869.91,1300.91 1275,1300.91 1312.5,1338.41 v1(1312.5,1512.5) 1312.5,1787.5 1325,1800 1575,1800 v1(1575,1925) ; 873.03,2665 858.03,2665 C307.2 757.38,2694.88 750,2687.5 750,2550 779.5,2520.5 874.71,2520.5 C306.2 876.62,2461.21 894.24,2443.59 v1(969.24,2443.59) ; v1(1362.5,2387.5) v1(1362.5,2825) ; v1(1462.5,2837.5) 1475,2850 1583.91,2850 ; U10.3 1583.91,2850 ; v1(1583.91,3024.91) 1583.91,2850 ; v1(1650,850) 1700,900 v1(1775,900) ; v1(2162.5,837.5) 2192.57,867.57 U20.21 2192.57,1698.91 2228.52,1734.85 ; v1(2177.91,1759.56) 2202.62,1734.85 2228.52,1734.85 ; C201.2 2228.52,1734.85 ; U20.5 2592.57,3355.07 2612.5,3375 v1(3112.5,3375) v1(3500,3375) ; 3387.5,1574.5 3431.91,1618.91 P301.4 3901.63,1776.91 3883.91,1794.63 U10.50 U10.49 3883.91,2802.91 3868.91,2817.91 v2(3868.91,2962.5) 3868.91,3358.59 3879.91,3369.59 R101.1 ; v1(3500,837.5) 3612.5,950 v1(3625,950) ; J302.1 3877.02,221.91 3949.91,294.8 3949.91,436.91 3883.91,502.91 U10.100 U10.99
  Bottom Layer w9.8: U400.18 1235.43,1827.07 1250,1812.5 ; 1312.2,1804.43 U400.21 ; v1(1312.5,1512.5) 1337.8,1537.8 U400.7 ; C404.1 1390.65,2034.35 1414.57,2010.43 U400.25 ; 1414.57,1806.2 U400.25 ; U400.26 U400.25
  Bottom Layer w25: C401.2@236.52,2386.71 236.52,2000 ; 245.37,2254.63 U41.1 ; C409.1 284.35,3009.35 287.5,3012.5 C402.1 459.35,3160.64 462.5,3163.79 J402.8 J402.9@533.71,3379.91 ; C407.1@307.38,2000 236.52,2000 ; C313.2 492.62,1317.87 579.58,1230.91 P302.3 579.58,1152.93 571.56,1144.91 C302.1 675,1087.5 687.5,1075 687.5,937.5 ; J402.9 J402.9@533.71,3379.91 ; P302.5 P302.4 201.63,1791.91 236.52,1826.8 236.52,2000 ; J301.4@687.5,791.2 687.5,937.5 ; J402.4@743.36,3159.85 825.91,3159.85 829.85,3163.79 J402.6 ; J402.7 J402.7@884.11,3379.91 ; 900,2450 916,2450 932.91,2466.91 932.91,3023.71 934.11,3024.91 ; C310.2 C309.2 900,617.91 828.44,689.47 C311.2 756.02,787.5 755.91,787.61 J301.4 683.91,834.91 665.91,852.91 171.44,852.91 153.44,834.91 C308.2 C312.2 153.44,346.56 175,325 225,325 300,250 3797.5,250 J302.1 3939.91,170.48 3960.37,190.94 C303.1 ; 1250,1812.5 1258.37,1804.13 1541.63,1804.13 1565.65,1828.15 ; v1(1362.5,2387.5) 1375,2387.5 1390.65,2371.85 C404.1 ; v1(1362.5,2825) 1450,2825 v1(1462.5,2837.5) ; v1(1575,1925) 1575,1837.5 1565.65,1828.15 ; U10.3 1583.91,2725.91 1639.91,2781.91 3847.91,2781.91 3883.91,2745.91 U10.49 ; v1(1650,850) 1637.5,837.5 1062.5,837.5 1037.5,862.5 762.5,862.5 687.5,937.5 ; C403.1 1565.65,1828.15 ; v1(1775,900) 1825,850 2925,850 2937.5,862.5 3475,862.5 v1(3500,837.5) ; U20.5 2592.57,3095.04 2578.44,3080.91 C202.2 2578.44,3024.91 v1(1583.91,3024.91) 934.11,3024.91 ; v1(3500,3375) 3500,3300 3575,3225 3575,2962.5 v2(3868.91,2962.5) ; v1(3625,950) 3662.5,987.5 4150,987.5 4212.5,1050 4205.12,1057.38 C314.2 ; U10.99 3960.91,693.91 4126.91,859.91 4256.91,859.91 4329.8,787.02 J303.1 4382.34,837.91 4346.56,873.69 C304.1 4346.56,1026.91 4298.47,1075 C314.2 ; U10.50 4071.91,2593.91 4121.11,2544.71 4121.11,2434.91 ; P301.4 P301.5 4366.19,1518.55 4271.56,1423.91 C301.1 4271.56,1271.93 4279.58,1263.91 P301.3 4279.58,1180.37 4205.12,1105.91 C314.2 ; J403.B 4121.11,2434.91 ; J403.6 4439.91,2261.43 4226.43,2474.91 4161.11,2474.91 4121.11,2434.91 ; J402.9@533.71,3379.91 J402.7@884.11,3379.91 ; J402.6 J402.7@884.11,3379.91 ; J402.6 884.11,3074.91 934.11,3024.91
  other v1: 3437.5,100 1187.5,125 2475,125 437.5,137.5 4462.5,375 1925,425 87.5,450 487.5,587.5 1362.5,887.5 3762.5,925 4475,1125 1012.5,1225 87.5,1387.5 3450,1387.5 3762.5,1412.5 662.5,1462.5 4412.5,1812.5 525,2137.5 87.5,2150 2375,2175 4362.5,2375 337.5,2687.5 1256.74,2943.59 4487.5,2950 2400,2962.5 325,3150 4125,3375 1300,3387.5 387.5,3425
KEY_CENTER: C308.1 J301.6 U10.58 | length 2362.1
  Bottom Layer w11.5: J301.6 355.52,787.61 342.91,775 C308.1 271.56,722.56 234.91,685.91 234.91,386.91 283.91,337.91 1735.91,337.91 1783.91,385.91 U10.58
KEY_DOWN: C309.1 J301.3 U10.83 | length 2966.2
  Top Layer w11.5: J301.3 683.91,350.91 2902.66,350.91 2938.66,386.91 2938.66,626.91 2951.66,639.91 3064.91,639.91 3083.91,658.91 U10.83
  Bottom Layer w11.5: J301.3 786.91,393.91 796.44,403.44 C309.1
KEY_LEFT: C310.1 J301.2 U10.60 | length 1538.4
  Bottom Layer w11.5: J301.2 573.67,434.91 591.67,452.91 983.91,452.91 999.91,436.91 999.91,403.44 C310.1 1143.44,403.44 1383.91,643.91 1866.91,643.91 1883.91,626.91 U10.60
KEY_RIGHT: C311.1 J301.5 U10.57 | length 2017.9
  Bottom Layer w11.5: J301.5 573.67,514.91 605.67,482.91 1053.91,482.91 1061.91,490.91 1061.91,623.56 946.56,738.91 C311.1@946.56,761.91 ; C311.1 C311.1@946.56,761.91 ; U10.57 1783.91,745.91 1767.91,761.91 C311.1@946.56,761.91
KEY_UP: C312.1 J301.1 U10.86 | length 3298.2
  Top Layer w11.5: J301.1 428,351.82 455.91,323.91 3143.91,323.91 3183.91,363.91 U10.86
  Bottom Layer w11.5: C312.1 271.56,450.26 327.91,393.91 J301.1
LCD_CS: R202.2 TP200.1 U10.10 U20.6 | length 1878
  Top Layer w11.5: U10.10 1846.91,2593.91 1837.91,2602.91 1837.91,3042.91 1881.16,3086.16 2024.16,3086.16 2044.91,3106.91 2044.91,3362.91 2087.91,3405.91 2487.91,3405.91 2512.5,3381.32 TP200.1 2512.5,3151.59 U20.6
  Bottom Layer w11.5: U20.6 2492.57,3213.91 2512.5,3233.84 R202.2
LCD_RD: R204.2 TP202.1 U10.89 U20.8 | length 5308.9
  Top Layer w11.5: v2(2026.91,545.91) 2037.91,556.91 2037.91,738.91 2044.91,738.91 2044.91,1741.91 2113.91,1810.91 2113.91,2382.91 2229.91,2498.91 2229.91,2626.91 2212.91,2643.91 2055.91,2643.91 2038.66,2661.16 2038.66,2836.66 2292.57,3090.57 U20.8 2292.57,3350 TP202.1
  Bottom Layer w11.5: v2(2026.91,545.91) 2026.91,538.91 2039.91,525.91 3591.91,525.91 3629.91,563.91 3629.91,626.91 3612.91,643.91 3399.91,643.91 3383.91,659.91 U10.89 ; R204.2 2287.5,3225.98 2292.57,3220.91 U20.8
LCD_RS: R203.2 TP201.1 U10.13 U20.7 | length 939.7
  Top Layer w11.5: U10.13 2083.91,2755.91 2392.57,3064.57 U20.7 2392.57,3350 TP201.1
  Bottom Layer w11.5: U20.7 2392.57,3219.91 2400,3227.34 R203.2
LCD_WR: R205.2 TP203.1 U10.53 U20.9 | length 3998.1
  Top Layer w11.5: v2(1537.91,3103.91) 1453.91,3103.91 1425,3075 1425,2762.5 1500,2762.5 1537.91,2724.59 1537.91,2554.91 1575.91,2516.91 1767.91,2516.91 1785.31,2499.51 1785.31,1771.91 1812.31,1744.91 1812.31,1352.31 1583.91,1123.91 U10.53 ; TP203.1 2192.57,3350 U20.9
  Bottom Layer w11.5: v2(1537.91,3103.91) 2183.91,3103.91 U20.9 2192.57,3208.91 2162.5,3238.98 R205.2
LED_PWR: PWR.A U10.62 | length 4597.4
  Top Layer w11.5: v2(3837.91,503.91) 3837.91,1445.91 3920.91,1528.91 3943.91,1528.91 3984.91,1569.91 3984.91,3029.47 3943.91,3070.47 PWR.A
  Bottom Layer w11.5: U10.62 1983.91,543.91 2023.91,503.91 v2(3837.91,503.91)
NetC301_2: C301.2 P301.2 U10.22 | length 4456.5
  Bottom Layer w11.5: U10.22 2483.91,1560.25 2535.91,1508.25 2726.91,1508.25 2740.57,1521.91 2983.91,1521.91 3024.91,1480.91 3024.91,1280.91 2999.91,1255.91 2887.91,1255.91 2845.91,1297.91 2845.91,1384.91 2791.91,1438.91 2717.91,1438.91 2705.91,1426.91 2705.91,1154.91 2739.91,1120.91 2739.91,959.02 2759.91,939.02 3016.02,939.02 3126.91,1049.91 3540.91,1049.91 3794.91,1303.91 C301.2@4153.44,1303.91 ; P301.2 4133.91,1257.91 4153.44,1277.44 C301.2@4153.44,1303.91 ; C301.2 C301.2@4153.44,1303.91
NetC302_2: C302.2 P302.2 U10.21 | length 3972.2
  Top Layer w11.5: P302.2 433.91,2178.91 478.91,2223.91 v2(1229.91,2223.91) ; U10.21 v2(2483.91,2877.91)
  Bottom Layer w11.5: P302.2 433.91,1158.44 453.44,1138.91 C302.2 ; v2(1229.91,2223.91) 1229.91,2819.91 1287.91,2877.91 v2(2483.91,2877.91)
NetC303_2: C303.2 J302.3 U10.96 | length 582.2
  Top Layer w11.5: U10.96 3683.91,383.65 3719.91,347.65 J302.3
  Bottom Layer w11.5: J302.3 3930.91,347.65 3969.5,309.06 C303.2
NetC304_2: C304.2 J303.3 U10.97 | length 1021.3
  Bottom Layer w11.5: U10.97 U10.97@3808.91,693.91 ; J303.3 4114.91,787.02 3972.8,644.91 3857.91,644.91 U10.97@3808.91,693.91 ; C304.2 4228.44,911.91 4033.91,911.91 U10.97@3808.91,693.91
NetC305_1: C305.1 R302.1 | length 137.8
  Top Layer w11.5: C305.1 R302.1
NetC305_2: C305.2 U10.16 | length 1282.5
  Top Layer w11.5: C305.2 1234.56,2397.35 1273.91,2397.35 1311.91,2435.35 v2(1311.91,2652.41)
  Bottom Layer w11.5: 1261.91,2639.91 2175.91,2639.91 2183.91,2631.91 U10.16
NetC306_1: C306.1 U30.2 U30.3 | length 325.2
  Top Layer w11.5: C306.1@983.27,2500 C306.1@999.15,2500 ; U30.2 U30.3
  Top Layer w12: 1034.74,2700.59 U30.2
  Top Layer w16: C306.1@999.15,2500 999.15,2665 1034.74,2700.59
NetC403_2: C403.2 U400.4 U400.17 | length 715.4
  Bottom Layer w11.5: 1209.84,1802.66 U400.17 ; 1412.5,1712.5 1414.57,1710.43 U400.4
  Bottom Layer w16: 1209.84,1802.66 1209.84,1765.16 1225,1750 1412.5,1750 ; 1412.5,1712.5 1412.5,1750 ; C403.2 1590.65,1721.85 1562.5,1750 1412.5,1750
NetHP1_2: HP1.2 R303.2 U30.5 | length 1289.3
  Top Layer w12: U30.5 959.15,2751.77
  Top Layer w16: HP1.2 140.26,3015.26 150,3025 800.33,3025 828.92,2996.41 828.92,2958.91 862.83,2925 R303.2 1000,2792.62 959.15,2751.77
NetHP1_3: HP1.3 U30.8 | length 1114.3
  Top Layer w11.5: HP1.3@136.3,2349.45 HP1.3@136.3,2415.85
  Top Layer w16: HP1.3@136.3,2415.85 136.3,2466.91 231.89,2562.5 500,2562.5 v2(500,2537.5) ; v2(812.5,2600) 815.29,2597.21 930.15,2597.21 U30.8@930.15,2671.29
  Bottom Layer w11.5: v2@810.91,2598.41 v2(812.5,2600)
  Bottom Layer w16: v2(500,2537.5) 515.59,2521.91 775.91,2521.91 810.91,2556.91 v2@810.91,2598.41
NetJ402_2: J402.2 U400.16 | length 2161.2
  Bottom Layer w11.5: J402.2 677.41,2974.41 861.91,2789.91 861.91,2530.91 819.81,2488.81 679.38,2488.81 665.47,2474.91 665.47,2009.53 675,2000 1100,2000 1112.5,1987.5 1112.5,1825 1175,1825 1184.25,1834.25 U400.16
NetJ402_3: J402.3 U400.15 | length 1934.3
  Bottom Layer w11.5: J402.3 708.91,3029.91 896.91,2841.91 896.91,2526.31 839.91,2469.31 709.31,2469.31 690.91,2450.91 690.91,2059.09 712.5,2037.5 1142.32,2037.5 1158.66,2021.16 U400.15
NetJ403_2: J403.2 R407.2 U10.36 | length 2461.1
  Top Layer w11.5: v2(3669.91,2518.91) 3687.91,2518.91 3707.91,2498.91 v2(3707.91,1904.91)
  Top Layer w16: R407.2 4294.59,1967.91 4337.5,1925 v2(4337.5,1887.5)
  Bottom Layer w11.5: U10.36 3183.91,2542.91 3207.91,2518.91 v2(3669.91,2518.91) ; v2(3707.91,1904.91) 4337.5,1904.91 4514.91,1904.91 4532.91,1922.91 4532.91,2075.2 4519.91,2088.2 J403.2
  Bottom Layer w16: v2(4337.5,1887.5) v2@4337.5,1904.91
NetJ403_3: J403.3 R408.2 U10.37 | length 3063.9
  Top Layer w11.5: U10.37 3333.91,2682.91 3333.91,2305.19 v2(3341.57,2297.52) ; R408.2 4117.91,2405.41 4269.59,2405.41 4314.17,2450 4462.5,2450 4462.5,2037.5 4425,2000 v2(4387.5,2000)
  Bottom Layer w11.5: v2(3341.57,2297.52) 3341.57,2050.91 3417.48,1975 3975,1975 4000,2000 4162.5,2000 4225,1937.5 4400,1937.5 4412.5,1950 4412.5,2000 ; v2(4387.5,2000) 4412.5,2000 ; J403.3 4439.91,2131.51 4412.5,2104.1 4412.5,2000
NetJ403_5: J403.5 U10.35 | length 2171.5
  Top Layer w12: U10.35 3183.91,2684.9 3138.41,2639.41 3138.41,2486.59 v2(3187.5,2437.5) ; v2(3412.5,2437.5) 3437.5,2437.5 v2(3437.5,2300)
  Bottom Layer w12: v2(3187.5,2437.5) v2(3412.5,2437.5) ; v2(3437.5,2300) 3475,2262.5 3525,2262.5 3525,2062.5 3537.5,2050 4150,2050 4200,2000 4312.5,2000 4337.5,2025 4337.5,2212.5 4343.12,2218.12 J403.5
NetJ403_7: J403.7 R409.2 U10.38 | length 1868.4
  Top Layer w11.5: R409.2@4361.5,2643.91 v2(4278.91,2643.91) 4278.91,2559.91 4327.91,2510.91 v2(4533.91,2510.91)
  Bottom Layer w11.5: U10.38 3283.91,2626.91 3300.91,2643.91 3607.91,2643.91 3633.91,2669.91 3633.91,2722.91 3650.91,2739.91 3820.91,2739.91 3837.91,2722.91 3837.91,2669.91 3863.91,2643.91 v2(4278.91,2643.91) ; J403.7 4523.74,2304.74 4533.91,2314.91 v2(4533.91,2510.91)
NetJ403_A: J403.A U10.33 | length 1643.7
  Top Layer w11.5: v2(3274.91,2353.91) 3274.91,2300.91 v2(3309.91,2265.91)
  Bottom Layer w11.5: U10.33 3083.91,2662.91 3129.91,2626.91 3129.91,2370.09 3146.09,2353.91 v2(3274.91,2353.91) ; v2(3309.91,2265.91) 3309.91,1986.91 3346.41,1950.41 J403.A
NetPWR_K: PWR.K R101.2 | length 125.9
  Top Layer w11.5: PWR.K R101.2
NetR301_1: R301.1 U30.1 | length 322.6
  Top Layer w16: R301.1@998.49,2389.34 1103.15,2494 1103.15,2668.59
NetR302_2: R302.2 R303.1 U30.4 | length 300.1
  Top Layer w11.5: U30.4 1164.15,2751.77 1165.53,2753.15 R302.2 ; 1103.15,2836 1106.3,2839.15
  Top Layer w16: U30.4 1103.15,2836 ; 1106.3,2839.15 R303.1
NetR401_2: R401.2 USB.A | length 125.9
  Top Layer w11.5: USB.A R401.2
NetTP204_1: TP204.1 U10.74 U20.20 | length 768.9
  Top Layer w11.5: U20.20 2292.57,802.25 2327.91,766.91 2375.91,766.91 2437.91,704.91 2437.91,658.66 2448.66,647.91 2567.91,647.91 2583.91,631.91 U10.74 2583.91,546.41 2550,512.5 TP204.1
NetU10_11: U10.11
NetU10_14: U10.14
NetU10_34: U10.34 U21.24 | length 580.6
  Top Layer w11.5: U21.24 3037.5,2289.91 3083.91,2336.32 U10.34
NetU10_54: U10.54 U20.10 | length 2885.5
  Top Layer w11.5: U10.54 1616.91,593.91 1633.91,610.91 1633.91,741.91 1671.91,779.91 1744.81,779.91 1831.81,866.91 1831.81,1031.81 1887.5,1087.5 1887.5,1762.5 1937.5,1762.5 1964.8,1789.8 1964.8,2468.58 1943.91,2489.46 1937.91,2489.46 1937.91,2948.66 2092.57,3103.32 U20.10
NetU10_67: U10.67 U21.22 | length 2856.6
  Top Layer w11.5: U10.67 2283.91,658.91 2303.66,639.16 2420.66,639.16 2437.91,621.91 2437.91,413.91 2471.91,379.91 2599.91,379.91 2631.91,411.91 2631.91,857.91 2544.91,944.91 2544.91,1038.06 2539.04,1043.94 2539.04,1634.91 2572.5,1668.37 3111.91,1668.37 3137.5,1693.96 U21.22
NetU10_68: U10.68 U21.29 | length 1836.4
  Top Layer w11.5: U10.68 2246.91,593.91 2237.91,602.91 2237.91,938.91 2239.91,940.91 2239.91,1468.35 2534.47,1762.91 2755.5,1762.91 2787.5,1794.91 U21.29
NetU10_73: U10.73 U20.19 | length 431.9
  Top Layer w11.5: U20.19 2392.57,859.28 2439.91,811.94 2542.88,811.94 2583.91,770.91 U10.73
NetU10_85: U10.85
NetU10_93: U10.93 U400.1 | length 2938.4
  Bottom Layer w11.5: U400.1 1491.34,1571.16 1512.5,1550 1750,1550 1762.5,1537.5 1762.5,1002.92 1863.91,901.52 3549.3,901.52 3583.91,866.91 U10.93
NetU10_94: U10.94 U400.5 | length 3248.5
  Bottom Layer w11.5: U400.5 1388.98,1511.02 1412.5,1487.5 1725,1487.5 1735.91,1476.59 1735.91,814.91 1767.91,782.91 2887.91,782.91 2929.91,740.91 2929.91,569.91 2951.91,547.91 3575.91,547.91 U10.94
NetU400_23: U400.23 USB.K | length 3484.6
  Top Layer w8: v2(1337.5,2012.5) 1525,2012.5 v2(1537.5,2025)
  Top Layer w11.5: v2(2437.5,2487.5) 2437.5,2512.5 2625,2512.5 2637.5,2525 2637.5,2850 2675,2887.5 3700,2887.5 USB.K
  Bottom Layer w8: v2(1337.5,2012.5) 1363.39,1986.61 U400.23
  Bottom Layer w11.5: v2(1537.5,2025) 1550,2012.5 1800,2012.5 1800,2375 1850,2425 2437.5,2425 v2(2437.5,2487.5)
USB_VCC: C402.2 J402.1 L400.1 | length 523.4
  Bottom Layer w19.68: 625,3037.5 645.92,3058.42 J402.1
  Bottom Layer w25: 625,3037.5 590.65,3037.5 C402.2 562.5,3009.35 562.5,2887.5 641.33,2887.5 648.52,2880.3 648.52,2775 L400.1
VCC: C201.1 C202.1 C307.1 C313.1 C314.1 C407.2 C408.1 J403.4 P301.1 P302.1 R202.1 R203.1 R204.1 R205.1 R301.2 R401.1 R407.1 R408.1 R409.1 U10.1 U10.2 U20.1 U20.2 U20.3 U20.4 U21.32 U30.6 U41.3 | length 18709.3
  Top Layer w11.81: 895.15,2742 910.97,2726.18 U30.6
  Top Layer w16: 2637.5,1890.56 U21.32
  Top Layer w25: R301.2 891.09,2282.5 887.5,2278.91 ; 895.15,2742 863.15,2774 828.15,2774 C307.1 755.12,2805.12 700,2750 700,2582.39 667.61,2550 625,2550 562.5,2487.5 v1(562.5,2412.5) 562.5,2275 575,2262.5 791.5,2262.5 807.91,2278.91 887.5,2278.91 ; v1(898.5,1371.85) 898.5,2111 912.5,2125 1480.32,2125 1483.91,2128.59 1483.91,2275 ; U10.1 U10.2 1483.91,2275 ; v1(1662.5,1112.5) 1787.5,1112.5 v1(1825,1150) ; v1(2275,1912.5) 2334.53,1852.97 C201.1 2599.91,1852.97 2637.5,1890.56 ; v1(2662.5,1300) 2787.5,1175 v1(2937.5,1175) ; v1(3437.5,1187.5) 3575,1050 v1(3625,1050) ; R401.1 3705.41,3375 3800,3375 v1(3800,3250) ; P301.1 3988.24,1252.24 4020.91,1284.91 4020.91,2087.5 ; R408.1 4232.09,2157.73 4271.91,2117.91 ; R409.1 4362.5,2950 4350,2962.5 4050,2962.5 4020.91,2933.41 v1(4020.91,2892.91) 4020.91,2087.5 ; v1(4387.5,2174.82) 4328.82,2174.82 4271.91,2117.91 ; 887.5,2278.91 1480,2278.91 1483.91,2275 ; 4020.91,2087.5 4026.32,2082.09 R407.1 4266.5,2082.09 4271.91,2087.5 4271.91,2117.91
  Bottom Layer w25: P302.1 288.24,1226.91 382.38,1321.05 C313.1 394.91,1337.5 394.91,1362.91 421.91,1389.91 880.44,1389.91 v1(898.5,1371.85) 898.5,1136 909.49,1125 1650,1125 v1(1662.5,1112.5) ; C407.2@417.62,2000 451.69,2000 ; C408.1@488.48,1862.5 488.48,1997.28 485.76,2000 451.69,2000 ; v1(562.5,2412.5) 562.5,2292.13 525,2254.63 U41.3 421.56,2178.44 451.69,2148.31 451.69,2000 ; U10.1 1483.91,2786.91 1528.91,2831.91 2663.91,2831.91 2696.56,2864.56 2696.56,2946.91 ; R205.1 R204.1 R203.1 R202.1 2652.33,3403.15 2692.57,3362.91 U20.4 ; v1(2275,1912.5) 1837.5,1912.5 1837.5,1162.5 v1(1825,1150) 2625,1150 2662.5,1187.5 v1(2662.5,1300) ; v1(2937.5,1175) 3425,1175 v1(3437.5,1187.5) ; U20.1 U20.2 U20.3 U20.4 ; v1(3625,1050) 3650,1075 4047.91,1075 ; v1(3800,3250) 3812.5,3237.5 4000,3237.5 4020.91,3216.59 v1(4020.91,2892.91) 2750.56,2892.91 2696.56,2946.91 ; P301.1 3988.24,1195.55 4039.91,1143.88 4039.91,1083 4047.91,1075 ; C314.1 4047.91,1075 ; v1(4387.5,2174.82) J403.4 ; U20.4 2692.57,3089.89 2696.56,3085.91 C202.1 2696.56,2946.91
pads on no net: HP1.1 HP1.4 J302.2 J302.4 J303.2 J303.4 J402.MH1 J402.MH2 J403.1 J403.8 J403.G0 J403.G1 J403.G2 J403.G3 U10.4 U10.12 U10.15 U10.17 U10.18 U10.23 U10.24 U10.25 U10.26 U10.27 U10.28 U10.29 U10.30 U10.31 U10.32 U10.51 U10.52 U10.55 U10.56 U10.59 U10.61 U10.63 U10.64 U10.65 U10.66 U10.69 U10.70 U10.71 U10.72 U10.76 U10.87 U10.90 U10.91 U10.92 U10.98 U20.22 U20.23 U20.24 U20.D1 U20.D2 U20.D3 U20.D4 U41.4 U400.2 U400.3 U400.6 U400.8 U400.9 U400.10 U400.11 U400.12 U400.13 U400.14 U400.19 U400.22 U400.24 U400.27 U400.28

## Polygon pours and split planes (outlines as drawn)
GND on Bottom Layer "Bottom Layer-GND" (solid, remove dead copper, pour order 2): 0,3503.94 4566.93,3503.94 4566.93,0 0,0
GND on Top Layer "Top Layer-GND" (solid, remove dead copper, pour order 4): 0,3503.94 4562.99,3503.94 4566.93,3500 4566.93,0 12.5,0 0,12.5

## Keep-outs
Top Layer:
  rectangle: 4075,2475 4250,2875
Keep-Out Layer:
  the board outline again, w3.94

## Silkscreen, mask and mechanical layers (free items; w line width, h text height)
Top Overlay:
  drawing of 28 lines, arcs and shapes, not listed
  text "USB" at 625,3362.5 h60
  text "Numero" at 4187.5,2950 h60 r90
  text "SD" at 4512.5,2137.5 h60 r90
  text "B" at 4250,900 h240
  text "5" at 487.5,837.5 h240
  text "3" at 237.5,512.5 h240
  text "4" at 800,512.5 h240
  text "Departement GEI - 2014" at 1250,275 h60
  text "6" at 487.5,212.5 h240
  text "A" at 3975,200 h240
  text "Version 1.2B" at 1250,150 h60
Top Solder:
  rectangle: 4062.5,2462.5 4262.5,2887.5
Mechanical 15:
  circle w10: c196.86,3307.1 r157.48
  circle w10: c4370.09,3307.1 r157.48
  circle w10: c4370.09,196.86 r157.48
  circle w10: c196.86,196.86 r157.48

## Text inside footprints (layer, text, board x,y; h text height)
J402: Mechanical 1 "PCB Edge" at 549.99,3485.93 h9.84 r180
U10: Bottom Overlay "P1" at 1302.81,2717.53 h60 r90; Bottom Overlay "P2" at 1302.81,709.66 h60 r90
U20: Top Overlay "1" at 3110.68,3171.27 h60 r270; Top Overlay "12" at 1673.67,3190.96 h60 r270; Top Overlay "13" at 3110.68,1025.6 h60 r270; Top Overlay "24" at 1673.67,1045.29 h60 r270